# Altium PCB 定位系统.PcbDoc
Units mil, origin at the board's own origin, x right, y up, seen from the top; angles counter-clockwise.
Board outline 2449.82 x 1510.05 mil, 2 copper layers (Top Layer, Bottom Layer); 58 components, 79 nets, 259 pads, 94 vias.
Unrouted connection lines stored in the file: 1.
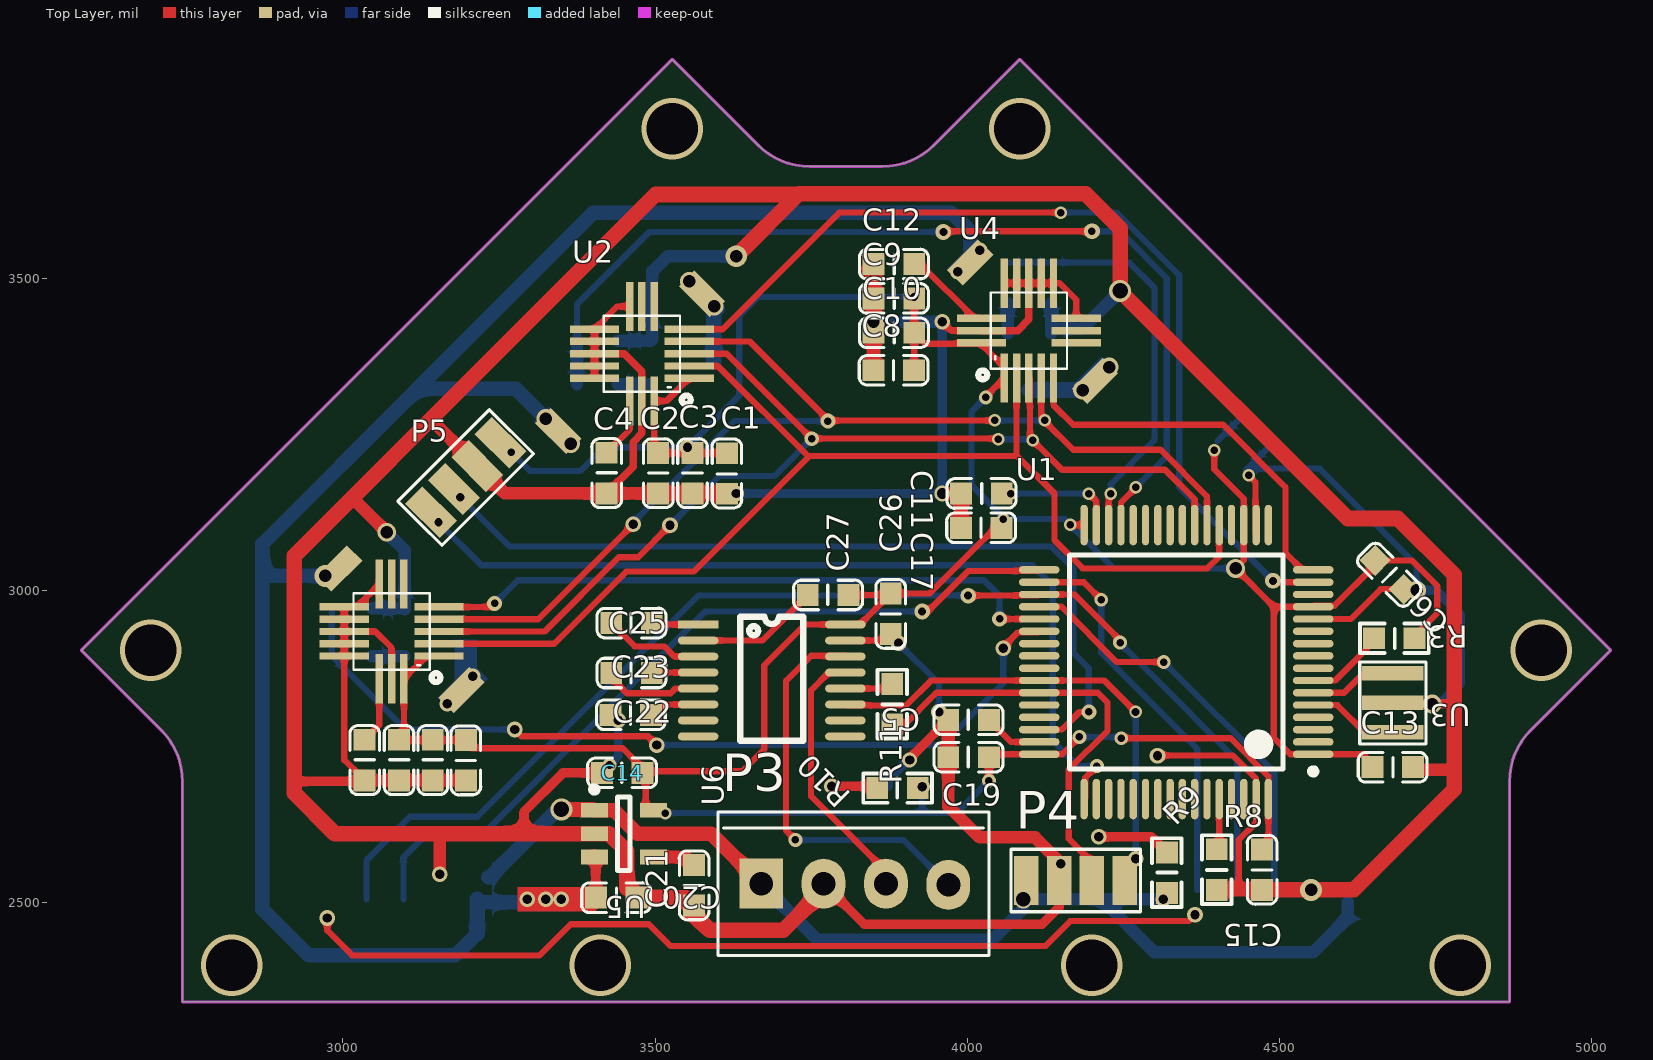
[diagram p0: Top Layer view]
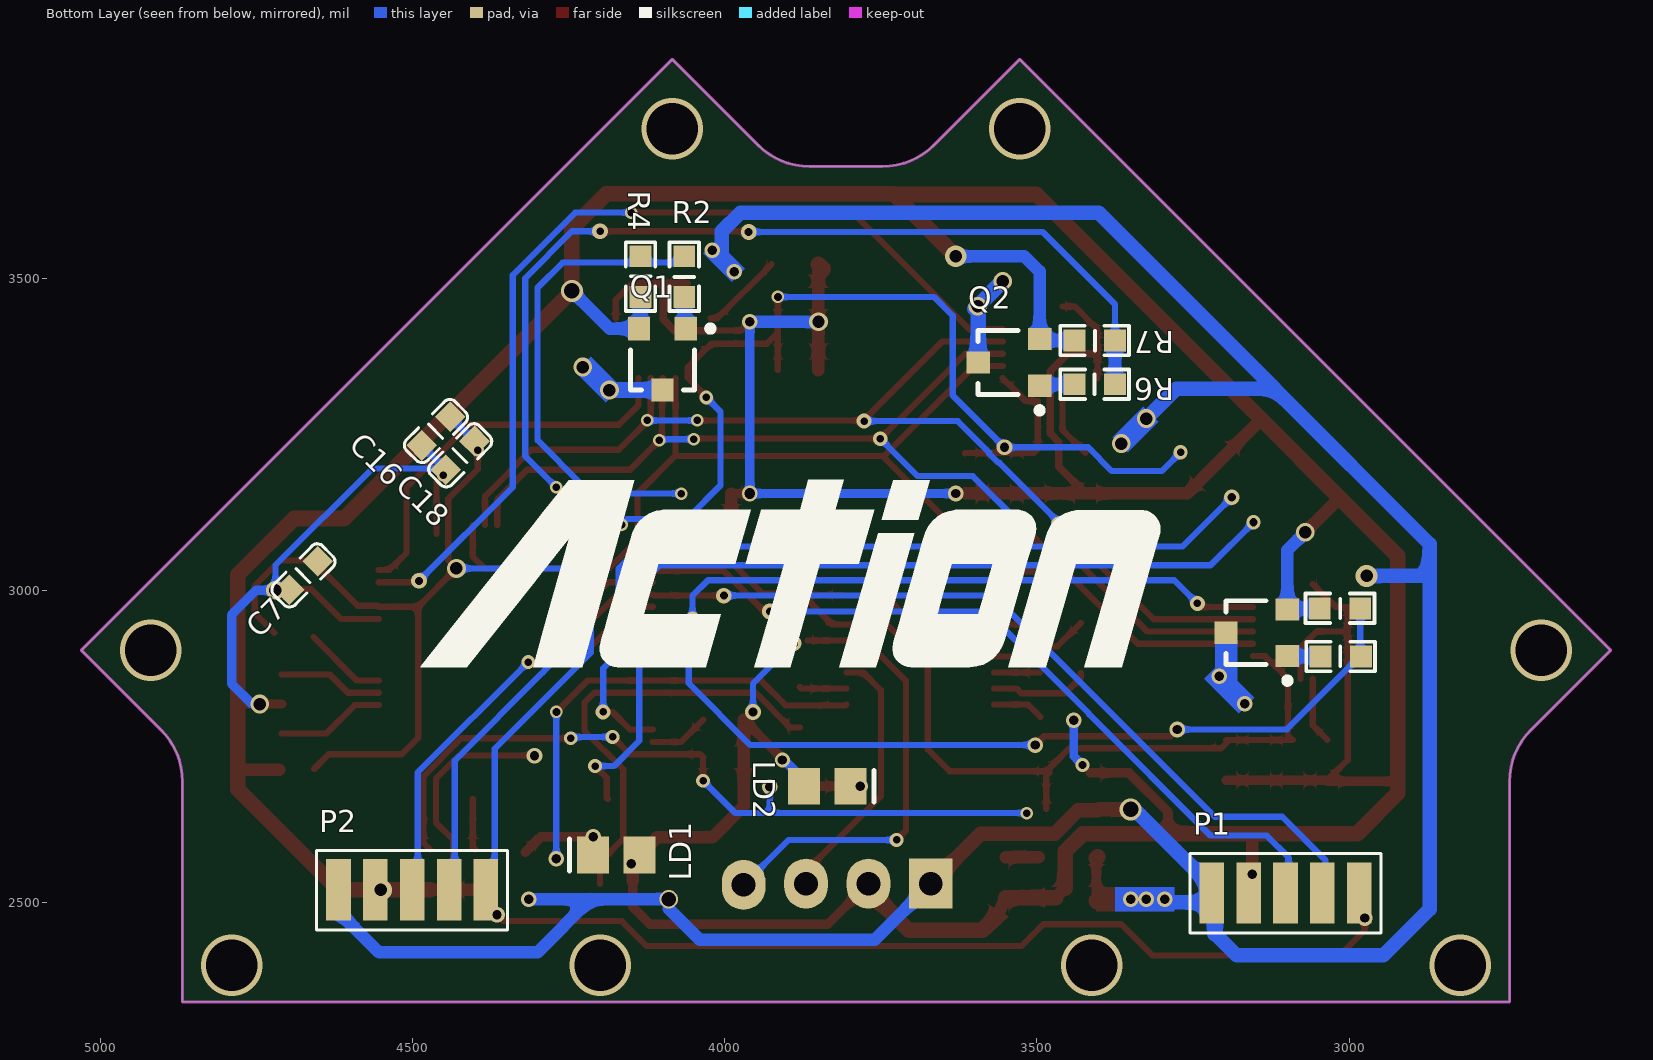
[diagram p1: Bottom Layer view, seen from below]
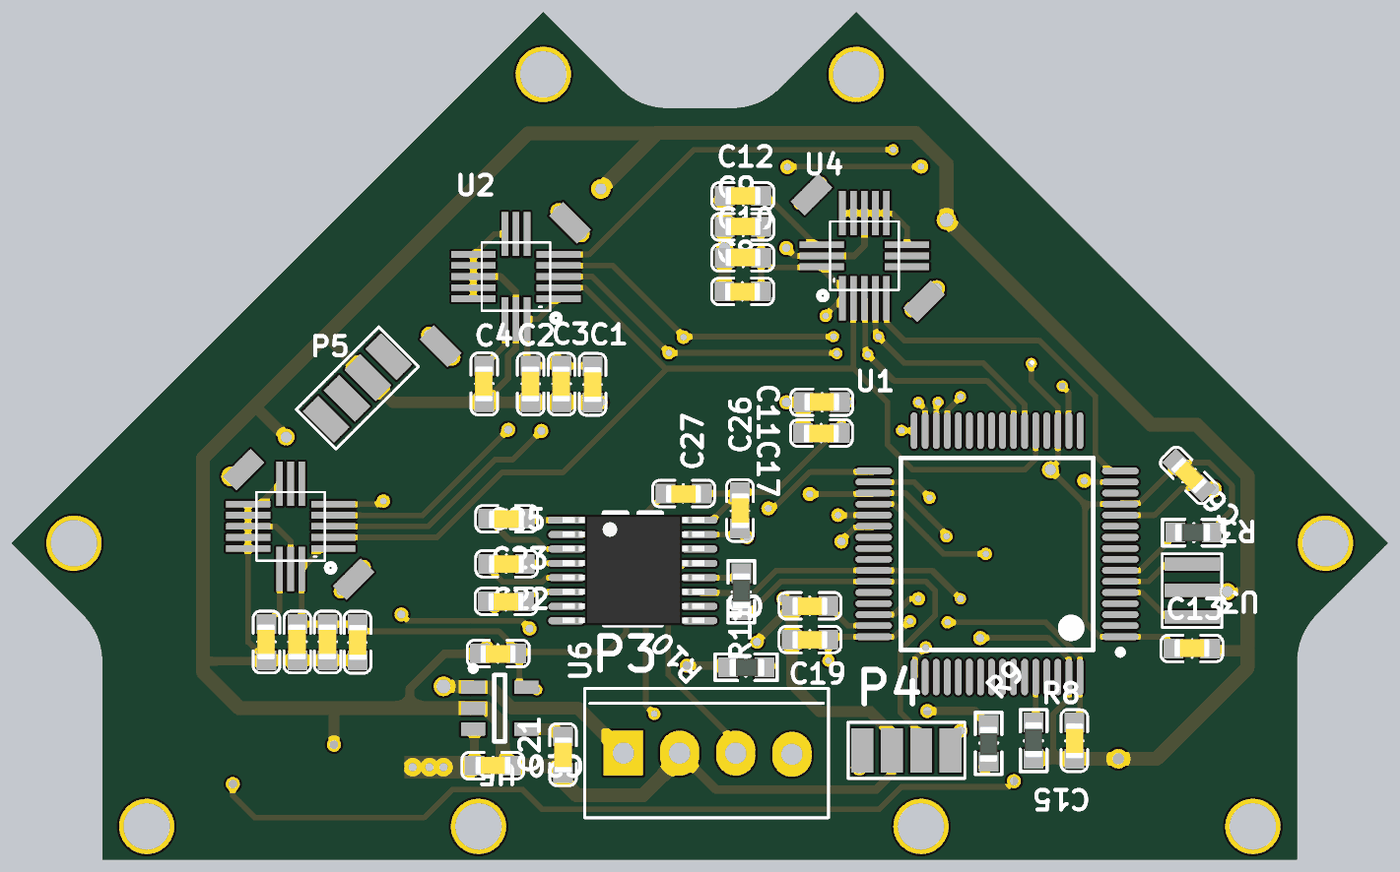
[diagram p2: 3D render of the assembled board from above, using the file's embedded part models]
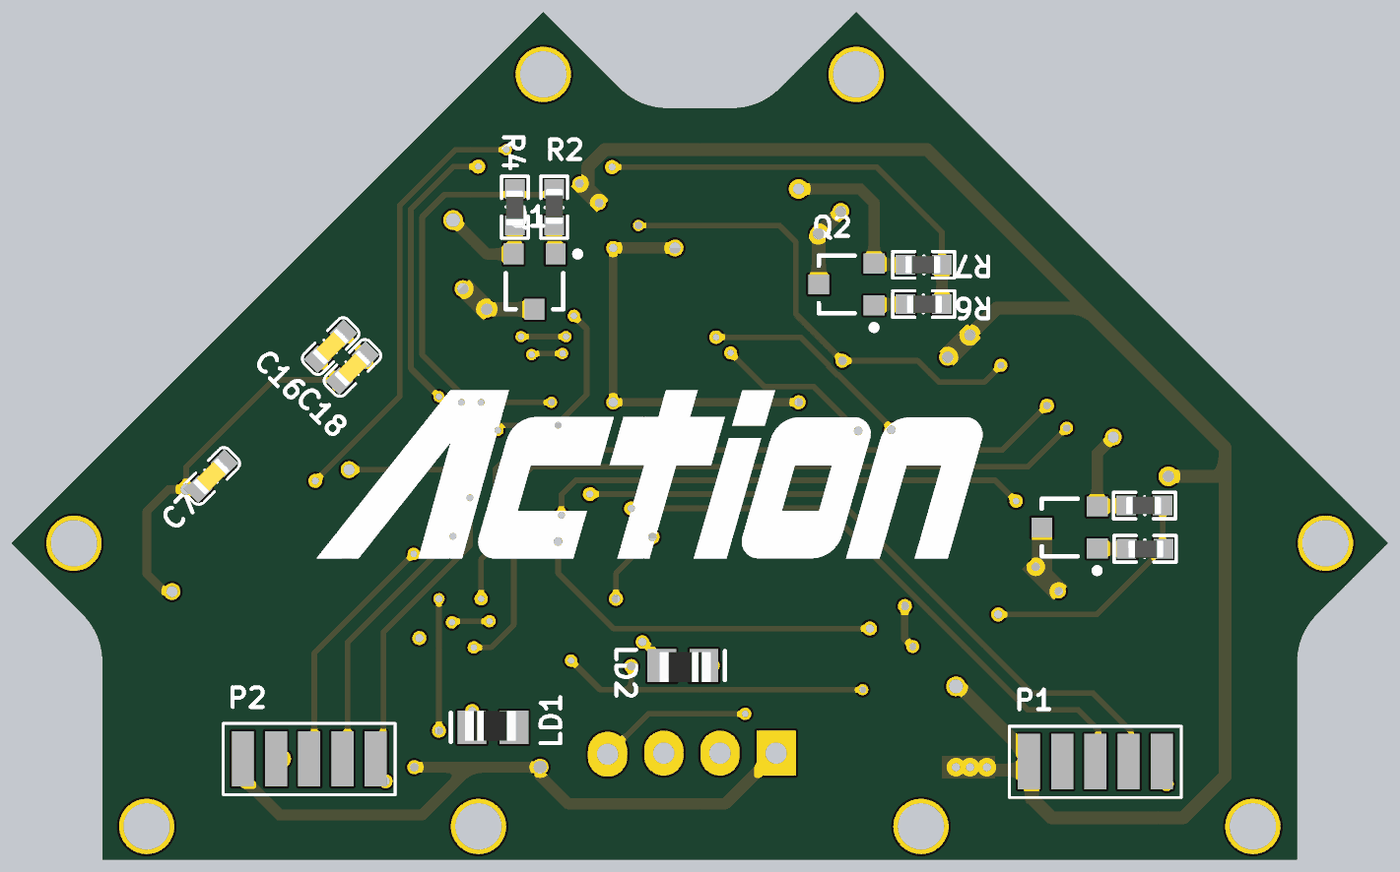
[diagram p3: 3D render of the assembled board from below, using the file's embedded part models]

## Layer stack, top to bottom
Top Solder: solder mask 0.4, Solder Resist, Dk 3.5
Top Layer: signal copper 1.4
Dielectric 1: dielectric 12.6, FR-4, Dk 4.8
Bottom Layer: signal copper 1.4
Bottom Solder: solder mask 0.4, Solder Resist, Dk 3.5

## Board outline
2742.96,2693.08 ccw(c2624.84,2693.08) 2708.36,2776.6 2581.04,2903.92 3527.56,3850.44 3664.44,3713.57 ccw(c3747.95,3797.08) 3747.95,3678.97 3863.94,3678.97 ccw(c3863.94,3797.08) 3947.46,3713.57 4084.34,3850.44 5030.86,2903.92 4903.53,2776.6 ccw(c4987.05,2693.08) 4868.94,2693.08 4868.94,2340.39 2742.96,2340.39

## Design rules (kind name [scope] priority, off if disabled: settings)
Clearance [All] p1: gap=7 ignorepadtopadclearanceinfootprint=FALSE
PolygonConnect [All] p1: connectstyle=Direct reliefconductorwidth=10 reliefentries=4 polygonreliefangle="90 Angle" airgapwidth=10
RoutingVias [All] p1: holewidth=28 width=50 viastyle="Through Hole" minholewidth=28 minwidth=50 maxholewidth=28 maxwidth=50
SolderMaskExpansion [All] p1: expansion=4
Width [All] p1: maxlimit=50 minlimit=10 preferedwidth=10
30 further rules are at their usual default settings.

## Classes and differential pairs
component class 定位系统: C1 C2 C3 C4 C5 C6 C7 C8 C9 C10 C11 C12 C13 C14 C15 C16 C17 C18 C19 C20 C21 C22 C23 C25 C26 C27 C? LD1 LD2 P1 P2 P3 P4 P5 Q1 Q2 R2 R3 R4 R6 R7 R8 R9 R10 R11 U1 U2 U3 U4 U5 U6 U? ""

## Components (designator, comment, footprint, x,y, rotation, side; value= is the part's Value field where it differs from the comment)
C1 "103" C-0603C 3642.6,3244.77 r270 top
C2 "104" C-0603C 3477.6,3129.77 r90 top
C3 "2.2uF" C-0603C 3532.6,3129.77 r90 top
C4 "0.1UF" C-0603C 3395,3130 r90 top value=0.47uF
C5 "2.2uF" C-0603C 4060,2765 r180 top
C6 "104" C-0603C 4655,3085 r315 top
C7 "105" C-0603C 4615,3045 r315 bottom
C8 "103" C-0603C 3940,3325 r180 top
C9 "104" C-0603C 3825,3495 r0 top
C10 "2.2uF" C-0603C 3825,3440 r0 top
C11 "2.2uf" C-0603C 3965.23,3182.6 r0 top
C12 "0.1UF" C-0603C 3825,3550 r0 top
C13 "104" C-0603C 4624,2744 r0 top
C14 "105" C-0603C 3505,2680 r180 top
C15 "104" C-0603C 4500,2610 r270 top
C16 "104" C-0603C 4402.68,3276.36 r315 bottom
C17 "104" C-0603C 4080.23,3072.6 r180 top
C18 "104" C-0603C 4363.79,3237.46 r315 bottom
C19 "106" C-0603C 4060,2705 r180 top
C20 "105" C-0603C 3380,2535 r0 top
C21 "105" C-0603C 3590,2585 r270 top
C22 "104" C-0603C 3519,2773 r180 top
C23 "104" C-0603C 3520,2840 r180 top
C24 "103" C-0603C 3224.4,2785.23 r270 top
C25 "104" C-0603C 3520,2920 r180 top
C26 "104" C-0603C 3905,3020 r270 top
C27 "104" C-0603C 3835,2965 r180 top
C28 "104" C-0603C 3062.4,2670.23 r90 top
C29 "2.2uF" C-0603C 3116.4,2670.23 r90 top
C30 "0.1UF" C-0603C 3007.4,2670.23 r90 top
LD1 "LED" D-0805D 4174,2576 r180 bottom
LD2 "LED" D-0805D 3836,2686 r0 bottom
P1 "Header 5" FPC5-1.0 3220,2515 r180 bottom
P2 "Header 5" FPC5-1.0 4619,2520 r180 bottom
P3 "4针排针" 4p-white 3670,2530 r0 top
P4 "4针排针" DOWMNPAD_S 4095,2535 r0 top
P5 "下载口" DOWMNPAD_S 3141,3125 r45 top
Q1 "NPN" sot-23 4100,3370 r0 bottom
Q2 "NPN" sot-23 3545,3365 r90 bottom
Q3 "NPN" sot-23 3148,2932 r90 bottom
R2 "331" R-0603R 4040,3560 r270 bottom
R3 "102" R-0603R 4627,2948 r0 top
R4 "103" R-0603R 4160,3445 r90 bottom
R6 "331" R-0603R 3350,3305 r0 bottom
R7 "103" R-0603R 3465,3425 r180 bottom
R8 "102" R-0603R 4425,2610 r270 top
R9 "102" R-0603R 4295,2490 r90 top
R10 "471" R-0603R 3946,2658 r180 top
R11 "0R" R-0603R 3905,2875 r270 top
R13 "331" R-0603R 2956,2869 r0 bottom
R14 "103" R-0603R 3072,2996 r180 bottom
U1 "MCU" LQFP64-STM32F405RG 4335,2885 r180 top
U2 "ICM-20608-G" ICM-20608-G 3540,3440 r180 top
U3 "TXAL-3" 8M贴片晶振 4682,2867 r270 top
U4 "ICM-20608-G" ICM-20608-G 4160,3355 r90 top
U5 "LDO-3.0V" SOT95P280X145-5N 3450,2610 r0 top
U6 "SP3232" TSSOP-16 3685,2955 r0 top
U7 "ICM-20608-G" ICM-20608-G 3139,2995 r180 top

## Footprints (in the part's own frame and the unit in brackets; to place one, negate y for a bottom-side part, rotate by r counter-clockwise, add the part's x,y. Pads: shape width x height; smd on the part's side, far side on the other; paste and mask are expansions set on the pad)
4p-white [mil]
  rect 70x80 hole 38: 1(0,0)
  oval 70x80 hole 38: 2(100,0) 3(200,0) 4(300,-2)
  silkscreen extent -69,-115 365,115
8M贴片晶振 [mm] "8M贴片晶振"
  rect 0.6x2.5 smd: 1(0,0) 2(1.2,0) 3(2.4,0)
  silkscreen extent -0.46,-1.35 2.87,1.35
C-0603C [mil]
  rect 35x35 smd: 1(25.23,-27.4) 2(90.23,-27.4)
  silkscreen extent 3,-51 113,-4, body extent 3,-51 113,-4, height 10
D-0805D [mm]
  rect 1.3x1.5 smd: 1(-0.95,0) 2(0.95,0)
  silkscreen extent -1.9,-0.65 -1.9,0.65, body extent -1.26,-0.61 1.04,0.74, height 0.76
DOWMNPAD_S [mm]
  rect 1x2 smd: 1(0,0) 2(1.333,0) 3(2.667,0) 4(4,0)
  silkscreen extent -0.64,-1.27 4.63,1.27
FPC5-1.0 [mm]
  rect 1x2.5 smd: 1(0,0) 2(1.5,0) 3(3,0) 4(4.5,0) 5(6,0)
  silkscreen extent -0.89,-1.63 6.88,1.6
ICM-20608-G [mm] "ICM-20608-G"
  rect 2x0.3 smd: 1(-0.375,2.55) 2(-0.375,2.05) 3(-0.375,1.55) 4(-0.375,1.05) 5(-0.375,0.55) 9(3.475,0.55) 10(3.475,1.05) 11(3.475,1.55) 12(3.475,2.05) 13(3.475,2.55)
  rect 0.3x2 smd: 6(1.05,-0.375) 7(1.55,-0.375) 8(2.05,-0.375) 14(2.05,3.475) 15(1.55,3.475) 16(1.05,3.475)
  silkscreen extent -0.43,0 3.1,3.61
LQFP64-STM32F405RG [mm] "TSQFP, 64-Leads, Body 12.0x12.0mm (max), Pitch 0.50mm, IPC Medium Density"
  oval 1.65x0.3 smd: 1(-5.575,3.75) 2(-5.575,3.25) 3(-5.575,2.75) 4(-5.575,2.25) 5(-5.575,1.75) 6(-5.575,1.25) 7(-5.575,0.75) 8(-5.575,0.25) 9(-5.575,-0.25) 10(-5.575,-0.75) 11(-5.575,-1.25) 12(-5.575,-1.75) 13(-5.575,-2.25) 14(-5.575,-2.75) 15(-5.575,-3.25) 16(-5.575,-3.75) 33(5.575,-3.75) 34(5.575,-3.25) 35(5.575,-2.75) 36(5.575,-2.25) 37(5.575,-1.75) 38(5.575,-1.25) 39(5.575,-0.75) 40(5.575,-0.25) 41(5.575,0.25) 42(5.575,0.75) 43(5.575,1.25) 44(5.575,1.75) 45(5.575,2.25) 46(5.575,2.75) 47(5.575,3.25) 48(5.575,3.75)
  oval 0.3x1.65 smd: 17(-3.75,-5.575) 18(-3.25,-5.575) 19(-2.75,-5.575) 20(-2.25,-5.575) 21(-1.75,-5.575) 22(-1.25,-5.575) 23(-0.75,-5.575) 24(-0.25,-5.575) 25(0.25,-5.575) 26(0.75,-5.575) 27(1.25,-5.575) 28(1.75,-5.575) 29(2.25,-5.575) 30(2.75,-5.575) 31(3.25,-5.575) 32(3.75,-5.575) 49(3.75,5.575) 50(3.25,5.575) 51(2.75,5.575) 52(2.25,5.575) 53(1.75,5.575) 54(1.25,5.575) 55(0.75,5.575) 56(0.25,5.575) 57(-0.25,5.575) 58(-0.75,5.575) 59(-1.25,5.575) 60(-1.75,5.575) 61(-2.25,5.575) 62(-2.75,5.575) 63(-3.25,5.575) 64(-3.75,5.575)
  silkscreen extent -5.7,-4.35 4.35,4.57, body extent -5,-5 5,5, height 1.6
R-0603R [mil]
  rect 35x35 smd: 1(25,-25) 2(90,-25)
  silkscreen extent 2,-49 113,-1, body extent 24,-40 87,-9, height 15
SOT95P280X145-5N [mm] "SOT23, 5-Leads, Body 3.0x3.0mm (max), Pitch 0.95mm, IPC Medium Density"
  rect 1.1x0.6 smd: 1(-1.2,0.95) 2(-1.2,0) 3(-1.2,-0.95) 4(1.2,-0.95) 5(1.2,0.95)
  silkscreen extent -1.32,-1.5 0.25,1.92, body extent -0.87,-1.52 0.87,1.53, height 1.45
sot-23 [mm]
  rect 0.9x0.95 smd: 1(-0.95,-1.25) 2(0.95,-1.25) 3(0,1.25)
  silkscreen extent -2.07,-1.37 1.3,1.25
TSSOP-16 [mil]
  rect 65x12.5 smd: 1(-116,-10)
  oval 65x12.5 smd: 2(-116,-35.59) 3(-116,-61.18) 4(-116,-86.77) 5(-116,-112.36) 6(-116,-137.95) 7(-116,-163.54) 8(-116,-189.13) 9(120,-189.13) 10(120,-163.54) 11(120,-137.95) 12(120,-112.36) 13(120,-86.77) 14(120,-61.18) 15(120,-35.59) 16(120,-10)
  silkscreen extent -48,-196 52,3, body extent -123,-197 129,-1, height 47

## Part data
C1 C2 C3 C4 C5 C6 C7 C8 C9 C10 C11 C12 C13 C15 C16 C17 C18 C19 C24 C28 C29 C30: library part Cap, "Capacitor", LatestRevisionDate=17-Jul-2002, LatestRevisionNote="Re-released for DXP Platform.", PackageReference=RAD-0.3, Published=8-Jun-2000, Publisher="Altium Limited"
C14 C20 C21 C22 C23 C25 C26 C27: library part CAP, "Capacitor"
P1 P2: "Header, 5-Pin", LatestRevisionDate=17-Jul-2002, LatestRevisionNote="Re-released for DXP Platform.", Publisher="Altium Limited"
P3 P4 P5: library part "Header 4", "Header, 4-Pin", LatestRevisionDate=17-Jul-2002, LatestRevisionNote="Re-released for DXP Platform.", Publisher="Altium Limited"
Q1 Q2 Q3: "NPN Bipolar Transistor", Code_JEDEC=TO-226-AA, LatestRevisionDate=17-Jul-2002, LatestRevisionNote="Re-released for DXP Platform.", PackageReference=TO-226, Published=8-Jun-2000, Publisher="Altium Limited"
R2 R3 R4 R6 R7 R9 R10 R13 R14: library part "Res Semi", "Semiconductor Resistor", LatestRevisionDate=17-Jul-2002, LatestRevisionNote="Re-released for DXP Platform.", PackageDescription="Axial Device, Thru-Hole; 2 Leads; 0.5 in Pin Spacing", PackageReference=AXIAL-0.5, Published=8-Jun-2000, Publisher="Altium Limited"
R8: library part Res2, "Resistor", LatestRevisionDate=17-Jul-2002, LatestRevisionNote="Re-released for DXP Platform.", PackageReference=AXIAL-0.4, Published=8-Jun-2000, Publisher="Altium Limited"
R11: library part RES2
U1: library part STM32F405RGT7
U5: library part TPS73230MDBVREP, "TPS73230MDBVREP"
U6: library part Component_1

## Free pads (board coordinates)
  rect 70x35 smd rot 135: 10(3575,3475) 11(3345,3255)
  rect 70x35 smd rot 45: 10(4005,3525) 11(2994,3035) 11(3190,2840) 11(4205,3335)

## Via types
v1: diameter 25, hole 15, Top Layer to Bottom Layer, 28 vias
v2: diameter 20, hole 12, Top Layer to Bottom Layer, 14 vias
v3: diameter 30, hole 20, Top Layer to Bottom Layer, 11 vias
v4: diameter 22, hole 12, Top Layer to Bottom Layer, 9 vias
v5: diameter 98.43, hole 82.68, Top Layer to Bottom Layer, 8 vias
v6: diameter 25, hole 13, Top Layer to Bottom Layer, 5 vias
v7: diameter 24, hole 12, Top Layer to Bottom Layer, 4 vias
v8: diameter 35, hole 20, Top Layer to Bottom Layer, 3 vias
v9: diameter 23, hole 13, Top Layer to Bottom Layer, 2 vias
v10: diameter 23, hole 12, Top Layer to Bottom Layer, 2 vias
v11: diameter 35, hole 25, Top Layer to Bottom Layer, 2 vias
v12: diameter 20, hole 13, Top Layer to Bottom Layer, 2 vias
v13: diameter 24, hole 15, Top Layer to Bottom Layer, 1 vias
v14: diameter 30, hole 23, Top Layer to Bottom Layer, 1 vias
v15: diameter 25, hole 12, Top Layer to Bottom Layer, 1 vias
v16: diameter 25, hole 17, Top Layer to Bottom Layer, 1 vias

## Nets (pads, with @x,y where several pads share a name; then routed paths per layer and width w, separated by ;. In a path a pad name is that pad's centre, name@x,y a point inside that pad or via, vN(x,y) a via of type N, cw(c..) or ccw(c..) an arc to the next point about the centre after c; other vN are vias at no path point)
3V: C1.1 C2.2 C3.2 C6.1 C7.1 C8.1 C9.2 C10.2 C13.1 C14.1 C15.1 C16.1 C17.1 C18.1 C19.1 C24.1 C26.1 C27.1 C28.2 C29.2 P5.4 R3.2 R10.1 U1.1 U1.13 U1.19 U1.32 U1.48 U1.64 U2.1 U2.16 U4.1 U4.16 U5.5 U6.16 U7.1 U7.16 | length 6014.8
  Top Layer w10: C28.2@3097.66,2773.59 U7.16 3134.08,2894.61 U7.1 ; C28.2@3098.06,2767.81 3090.25,2760 C24.1 ; C24.1@3193,2759 3205,2747 3448,2747 3479.77,2715.23 C14.1 ; U5.5@3485,2650 C14.1@3485,2707.4 ; C14.1@3485,2712.62 3482.38,2710 3640,2710 3675,2745 3675,2880 3740,2945 U6.16 3827.83,2945 3875.23,2992.4 C27.1 ; U2.1 3518.35,3303.19 U2.16 3498.66,3226.34 C2.2 C3.2 3614.75,3220 C1.1 ; C26.1@3890,2995 3940,2995 4045,3100 C17.1 ; C8.1@3915.23,3352.85 C10.2 ; C9.2 C10.2 ; v4(4030,3309) 4030,3310.63 U4.1 4059.61,3357.24 4021.85,3395 3932.83,3395 C10.2 ; v4(4035,2695) 4035,2732.17 C19.1 4039.74,2737.36 U1.48 4152.36,2737.36 v4(4180,2765) ; v2(4165,3105) 4165.51,3104.49 U1.32 ; v4(4247,2763) 4422,2763 4482.64,2702.36 U1.64 4482.64,2594.81 C15.1 ; v2(4396,3224) 4396,3194 4443.27,3146.73 U1.19 4443.27,3048.27 v3(4430,3035) 4491.42,2973.58 ; C13.1@4658.23,2713.6 4634.47,2737.36 U1.1 4517.64,2737.36 4491.42,2763.58 4491.42,2973.58 ; R3.2@4722,2932 4753,2963 4753,3007 4712.21,3047.79 C6.1 4653.46,3040.35 4588.48,2975.36 4556.27,2975.36 U1.13 4491.42,2973.58
  Bottom Layer w10: v10(3270,3221) 3300,3191 3380,3191 3418,3229 v1(3552,3229) 3635,3312 3635,3440 3665,3470 v12(3915,3470) ; v2(3516,2643) 3928,2643 ; v1(3928,2685) 3928,2643 ; v4(4030,3309) 4007,3286 4007,3168 4058,3117 v2(4058,3114) 4157,3114 4156.5,3113.5 v2(4165,3105) 4235,3035 v3(4430,3035) ; v4(4035,2695) 3983,2643 3928,2643 ; v4(4180,2765) 4245,2765 v4(4247,2763) ; C18.1 C16.1 C16.1@4446,3284
+5V: C20.1 P1.1 P2.1 P3.1 P4.1 pad.10@4005,3525 pad.11@2994,3035 pad.11@3345,3255 R9.1 U5.1 U5.3 | length 4724
  Top Layer w15: C20.1@3405,2512.32 U5.3@3405,2570.35
  Top Layer w23: v11(3350,2649) U5.1@3400.16,2649 ; U5.1 3434.25,2647.4 3471.65,2610 3590,2610 P3.1
  Top Layer w25: C20.1@3402.76,2500.07 C20.1@3405,2502.32 ; U5.3 U5.3@3405,2570.35
  Bottom Layer w20: P3.1 3760,2440 4040,2440 4090,2490 v14(4090,2505) 4215,2505 ; v1@4316,2503 v1(4314,2505) 4215,2505 ; P2.1@4610,2500 4610,2476 4554,2420 4300,2420 4215,2505
  Bottom Layer w23: v8(2972,3023) 2885,3023 2871,3037 ; 3120,3323 2871,3074 2871,3037 ; 3215,2450 3180,2415 2945,2415 2871,2489 2871,3037 ; P1.1@3220,2500 v1@3295,2500 ; P1.1@3233,2540 3235,2540 v11@3345,2650 ; v3(3365,3235) 3277,3323 3119,3323 3401,3605 3975,3605 4005,3575 4005,3534
  Bottom Layer w25: 3215,2450 3215,2505 P1.1@3220,2500 ; v1(3295,2505) v1(3325,2505)
  other v1: 3350,2505 3985,3510 4020,3545
  other v3: 3325,3275
GND: C1.2 C2.1 C3.1 C4.1 C5.2 C6.2 C7.2 C8.2 C9.1 C10.1 C11.1 C12.1 C13.2 C14.2 C15.2 C16.2 C17.2 C18.2 C19.2 C20.2 C21.2 C22.2 C24.2 C26.2 C28.1 C29.1 C30.1 LD1.2 LD2.2 P1.2 P2.2 P3.2 P4.2 P5.3 Q1.2 Q2.2 Q3.2 R4.1 R7.1 R8.2 R14.1 U1.12 U1.18 U1.63 U2.8 U2.9 U2.10 U2.11 U2.12 U2.13 U2.15 U3.2 U4.8 U4.9 U4.10 U4.11 U4.12 U4.13 U4.15 U5.2 U6.15 U7.8 U7.9 U7.10 U7.11 U7.12 U7.13 U7.15 | length 11557
  Top Layer w10: 3002.19,2727.66 U7.13 U7.12 U7.11 ; 3002.59,2727.66 C30.1 ; U7.8 3021.87,2973.35 U7.9 U7.10 U7.11 ; U7.15 3077.98,2908.02 3052.02,2933.98 U7.11 ; U2.13 U2.12 U2.11 U2.10 U2.9 3439.61,3454.76 U2.8 ; C1.2@3614.53,3155.23 C1.2 ; U6.15 C26.2@3867.24,2919.41 ; v1(3960,3430) 3973.98,3416.02 U4.15 ; C11.1@3990,3154.75 C11.1 ; U4.13 U4.12 U4.11 U4.9 4148.19,3491.81 4174.76,3465.24 U4.8 ; v1(4305,2735) 4305.48,2735.48 4425.48,2735.48 4462.95,2698.01 U1.63 4462.95,2627.95 4435,2600 4435,2520 ; v2(4451,3184) 4458.95,3176.05 ; U1.18@4461.95,3090.49 4461.95,3173.05 ; U1.12 4614.9,2953.9 4662.83,3001.83 C6.2
  Top Layer w12: U2.11 3451.02,3378.98 3478.98,3351.02 U2.15 3478.98,3251.35 3465,3237.37 3465,3197.83 C4.1 ; U4.15 4081.02,3416.02 4098.98,3433.98 U4.11
  Top Layer w15: 2920,2694 C30.1@3034.79,2694 ; C30.1 C28.1 C29.1 C24.2@3196.55,2695.45 ; 3290,2610 3290,2645 3352.4,2707.4 C14.2 ; P3.2 3835,2465 4120,2465 4147.49,2492.49 P4.2 ; v13(3908,2728) 3908,2730.62 C5.2 ; v16(3960,3155) C11.1@3989.75,3155 ; U3.2@4710,2817.76 4762.24,2817.76 4762,2818 4782,2818
  Top Layer w20: 3015,3148 v3(3070,3093) ; 3140.5,3273.5 3140.97,3273.5 P5.3 3259.25,3155.23 C4.1 C1.2@3614.53,3155.23 ; v1(3155,2545) 3155,2610 ; C20.2@3455,2522.83 C20.2 ; C21.2@3549.77,2507.6 C21.2@3562.6,2479.77 ; C8.2@3850.23,3352.85 C9.1 C12.1 ; C5.2 C19.2 3969.77,2654.23 4020,2604 4109.1,2604 4147.49,2565.6 P4.2 ; C17.2 C11.1@3990,3154.75 ; R8.2 4435,2520 C15.2@4472.38,2520 ; C13.2@4714.23,2712.6 4780.6,2712.6
  Top Layer w25: C20.2@3455,2522.83 3455,2581.4 3426.4,2610 U5.2 3290,2610 2987,2610 2922,2675 2922,3055 3015,3148 3140.5,3273.5 3501,3634 3729,3634 v8(3630,3535) ; C20.2 C21.2@3549.77,2507.6 ; C21.2@3562.6,2479.77 3587.38,2455 3705,2455 3770,2520 P3.2 ; 3730,3635 4190,3635 4245,3580 v11(4245,3479.65) 4609.65,3115 4690,3115 4780.6,3024.4 4780.6,2712.6 4780.6,2681.6 4619,2520 C15.2@4472.38,2520 ; C12.1@3842.62,3515 C12.1
  Bottom Layer w10: v1(3890,2915) 3955,2850 v1(3955,2805) ; v16(3960,3155) v16@3965,3155 ; Q1.2@4135,3411.61 Q1.2@4137.4,3409.21 ; C18.2 C16.2 ; C18.2@4455,3195 4565,3195 4720,3040 v3(4720,3000)
  Bottom Layer w13: v9(3427,2720) 3441,2734 v1(3441,2792)
  Bottom Layer w15: v1(3630,3155) v16(3960,3155) v1(3960,3430) ; LD2.2 3873.4,2696.03 3905.38,2728 v13(3908,2728) ; v3(4720,3000) 4751,3000 4790,2961 4790,2850 4757.76,2817.76 v3(4745,2817.76)
  Bottom Layer w20: R14.1 3097.19,2971 Q3.2 3098.79,3064.21 v3(3070,3093) ; R7.1 Q2.2@3493.39,3400 ; Q2.2 3495.79,3510.79 3520,3535 v8(3630,3535) ; v3(3850,3430) v1(3960,3430) ; Q1.2@4135,3411.61 R4.1@4135,3460 ; Q1.2 4184.56,3419.21 v11(4245,3479.65)
  other v1: 4150,2562
  other v8: 4550.94,2520
Net_1: pad.11@3190,2840 Q3.3
  other v1: 3167,2818 3208,2862
Net_2: Q3.1 R13.2 | length 52.2
  Bottom Layer w20: R13.2 Q3.1@3098.19,2894
Net_2: C30.2 U7.14 | length 107.5
  Top Layer w10: C30.2 3058.29,2783.95 U7.14
NetC4_2: C4.2 U2.14 | length 98.2
  Top Layer w10: C4.2 3459.29,3257.12 U2.14
NetC5_1: C5.1 U1.47 | length 95.4
  Top Layer w10: C5.1 4070.12,2757.05 U1.47
NetC11_2: C11.2 U1.31 | length 180.5
  Top Layer w10: v2(4195,3155) 4207.05,3142.95 U1.31
  Bottom Layer w10: v2(4070,3155) v2(4195,3155)
NetC12_2: C12.2 U4.14 | length 134
  Top Layer w10: C12.2@3925.23,3522.6 4012.12,3435.71 U4.14
NetC21_1: C21.1 U5.4 | length 52.5
  Top Layer w20: U5.4 C21.1@3549.78,2572.6
NetC22_1: C22.1 U6.6 | length 82.4
  Top Layer w10: C22.1@3494.77,2797.4 3514.42,2817.05 U6.6
NetC23_1: C23.1 U6.4 | length 73.4
  Top Layer w10: C23.1@3495.6,2868.23 U6.4
NetC23_2: C23.2 U6.5 | length 160
  Top Layer w10: C23.2 3429.77,2860.23 3455,2835 3525,2835 3532.64,2842.64 U6.5
NetC25_1: C25.1 U6.1 | length 75.2
  Top Layer w10: C25.1 3497.17,2945 U6.1
NetC25_2: C25.2 U6.3 | length 161.4
  Top Layer w10: C25.2 3467.17,2910 3515,2910 3531.18,2893.82 U6.3
NetC27_2: C27.2 U6.2 | length 206
  Top Layer w10: U6.2 3671.79,2919.41 C27.2
NetLD1_A: LD1.1 R9.2 | length 119.4
  Top Layer w15: v1(4211,2605) 4295,2605 R9.2
NetLD2_A: LD2.1 R10.2 | length 69
  Top Layer w15: v1(3783,2686) R10.2@3852,2686
NetQ1_1: pad.11@4205,3335 Q1.3 | length 142.7
  Bottom Layer w25: Q1.3 4190.79,3320.79 v3(4227.5,3357.5)
  other v3: 4185,3320.79
NetQ1_2: Q1.1 R2.2 | length 51.8
  Bottom Layer w10: Q1.1@4062.6,3409.21 Q1.1@4065,3411.61
  Bottom Layer w20: Q1.1@4065,3411.61 R2.2@4065,3460
NetQ2_1: pad.10@3575,3475 Q2.3 | length 153.3
  Bottom Layer w25: v3(3555,3495) v3@3599.21,3450.79 ; Q2.3 v3@3594.21,3455.79
  other v3: 3595,3455
NetQ2_2: Q2.1 R6.2 | length 53.4
  Bottom Layer w20: R6.2 Q2.1@3493.39,3330
NetR3_1: R3.1 U1.7 | length 133.3
  Top Layer w10: U1.7 4589.47,2855.47 R3.1@4659,2925
NetR8_1: R8.1 U1.60 | length 82.1
  Top Layer w10: R8.1 4403.9,2588.9 U1.60
NetR11_1: R11.1 U6.12 | length 76
  Top Layer w10: U6.12 3877.64,2842.64 R11.1@3880,2845
OSC_IN: U1.5 U3.3 | length 174.4
  Top Layer w10: U1.5 4592.9,2816.1 4638.49,2770.51 U3.3@4710,2770.51
OSC_OUT: U1.6 U3.1 | length 167.6
  Top Layer w10: U1.6 4603.79,2835.79 4633,2865 U3.1@4710,2865
PA0: U1.14
PA1: U1.15 U2.5 | length 1521.4
  Top Layer w10: U2.5 3608.35,3418.35 3795,3605 v2(4150,3605) ; v6(4490,3015) 4492.05,3012.95 U1.15
  Bottom Layer w10: v2(4150,3605) 4240,3605 4340,3505 4340,3165 v6(4490,3015)
PA2: U1.16 U4.5 | length 630.6
  Top Layer w10: U4.5 4138.35,3296.65 4170,3265 4375,3265 4410,3265 4510,3165 4510,3060 4537.36,3032.64 U1.16
PA3: U1.17
PA4: U1.20
PA5: U1.21 U2.2 U4.2 U7.2 | length 1928.1
  Top Layer w10: U7.2 3338.29,2914.29 3454,3030 3562,3030 3746,3214 3600.71,3359.29 U2.2 ; 3745,3215 4079.29,3215 U4.2 ; 4080,3215 4140,3155 4140,3080 4185,3035 4385,3035 4403.9,3053.9 U1.21
PA6: U1.22 U2.4 U4.4 U7.4 | length 1810.8
  Top Layer w10: U7.4 3312.66,2953.66 v1(3465,3106) ; U2.4 3651.34,3398.66 3778,3272 v2(4044,3272) ; U4.4 4118.66,3276.34 4123,3272 v2(4124,3272) 4124,3271 4170,3225 4310,3225 4384.21,3150.79 U1.22
  Bottom Layer w10: v1(3465,3106) 3465,3109 3560.5,3204.5 3562.15,3204.5 3576.5,3218.85 3576.5,3220.5 3627,3271 v7(3777,3271) ; v2@4040.66,3272 v2(4044,3272) v2(4124,3272)
PA7: U1.23 U2.3 U4.3 U7.3 | length 1775.4
  Top Layer w10: U7.3 3322.98,2933.98 3442,3053 3473,3053 v1(3524,3104) ; U2.3 3615.02,3378.98 v10(3751,3243) 4049,3243 v2(4050,3242) ; U4.3 4100.76,3338.46 4100.76,3244.24 v2(4105,3240) 4152,3193 4317,3193 4364.53,3145.47 U1.23
  Bottom Layer w10: v1(3524,3104) 3603,3183 3691,3183 v10(3751,3243) ; v2(4050,3242) 4103,3242 v2(4105,3240)
PA8: U1.41
PA9: P4.4 U1.42 U6.11 | length 738.1
  Top Layer w10: U6.11 3806.55,2815.5 3902.47,2815.5 3942.44,2855.47 U1.42 4219.53,2855.47 v12(4270,2805)
  Bottom Layer w10: v1(4270,2570) v12(4270,2805)
PA10: P4.3 R11.2 U1.43 | length 705.6
  Top Layer w10: R11.2@3880,2780 3895,2780 3950.79,2835.79 U1.43 4209.21,2835.79 4225,2820 4225,2775 4163,2713 4163,2602 4199.99,2565.01 P4.3@4199.99,2530
PA11: U1.44
PA12: U1.45
PA15: U1.50
PB0: U1.26
PB1: U1.27
PB2: U1.28
PB3: U1.55
PB4: U1.56
PB5: U1.57
"PB6 TX": U1.58
"PB7 RX": U1.59
PB8: U1.61
PB9: U1.62
PB10: R6.1 R7.2 U1.29 | length 1583.5
  Top Layer w10: v6(3962,3574) 3963,3575 v15(4200,3575) v15@4200,3580 ; U1.29 4246.42,3140.3 4270,3163.89 v2(4270,3165)
  Bottom Layer w10: R7.2 3375,3458 3491,3574 v6(3962,3574) ; v15(4200,3575) 4245,3575 4320,3500 4320,3215 v2(4270,3165)
  Bottom Layer w20: R6.1 R7.2
PB11: R2.1 R4.2 U1.30 | length 662.4
  Top Layer w10: U1.30 4226.73,3151.73 v2(4230,3155)
  Bottom Layer w10: R2.1@4065,3525 4260,3525 4300,3485 4300,3240 4230,3170 v2(4230,3155)
PB12: P1.3 U1.33 | length 1276.7
  Top Layer w10: v6(3928,2966) 3937,2966 4001.86,3030.86 4113.73,3030.86 U1.33
  Bottom Layer w10: P1.3@3096.89,2505 3096.89,2571.89 3132,2607 3222,2607 3416.5,2801.5 3416.5,2802.15 3580.35,2966 v6(3928,2966)
PB13: P1.5 P2.5 U1.34 | length 2123.3
  Top Layer w10: v1(2975,2475) 2975,2455 3015,2415 3315,2415 3365,2465 3490,2465 3525,2430 4125,2430 4165,2470 4355,2470 v1(4365,2480) ; U1.34 4187.05,3012.95 v4(4215,2985)
  Bottom Layer w10: v4@4215,2986 v4(4215,2985) 4215,2900 4368.78,2746.22 P2.5@4368.78,2520
PB14: P1.4 P2.4 U1.35 | length 1950.8
  Top Layer w10: v6(4001.51,2991.49) 4113.73,2991.49 U1.35 4171.73,2993.27 4245,2920 v4(4245,2916.25)
  Bottom Layer w10: P1.4@3037.83,2505 3037.83,2567.83 3107,2637 3215,2637 3569.49,2991.49 v6(4001.51,2991.49) ; v4(4245,2916.25) 4245,2915 4290,2870 ; 4292.5,2867.5 4432.83,2727.17 P2.4@4432.83,2520
PB15: P2.3 U1.36 | length 674.5
  Top Layer w10: U1.36 4151.42,2973.58 4240,2885 v4(4315,2885)
  Bottom Layer w10: v4(4315,2885) 4491.89,2708.11 P2.3@4491.89,2520
PC0: U1.8
PC1: U1.9
PC2: U1.10
PC3: U1.11
PC4: U1.24
PC5: U1.25
PC6: U1.37 U7.5 | length 1026.8
  Top Layer w10: U7.5 3237.35,2973.35 v7(3243,2979) ; v7(4052,2954) 4115.41,2954 U1.37
  Bottom Layer w10: v7(3243,2979) 3280,3016 4027,3016 4052,2991 v7(4052,2954)
PC7: R13.1 R14.2 U1.38 | length 1378.1
  Top Layer w10: v1(3275,2777) 3286,2766 3489,2766 v1(3503,2752) ; v1(4058,2907) 4058,2908.91 4081.52,2932.43 4113.73,2932.43 U1.38
  Bottom Layer w10: R14.2 2982,2895 3100,2777 v1(3275,2777) ; v1(3503,2752) 3959,2752 4058,2851 v1(4058,2907)
PC8: U1.39
PC9: U1.40
PC10: U1.51
PC11: U1.52
PC12: U1.53
PC13: U1.2
PC14: U1.3
PC15: U1.4
PD2: U1.54
RXD: P3.3 U6.13 | length 427.4
  Top Layer w10: U6.13 3778.53,2868.23 3750,2839.7 3750,2670 P3.3@3885,2535
TCK: P5.1 U1.49 | length 1423.8
  Top Layer w10: U1.49 4189.14,2667.29 4189.14,2699.5 v4(4208,2718.36)
  Bottom Layer w10: v9(3153,3109) 3222,3040 4104.59,3040 4137,3007.59 4137,2759 4177.64,2718.36 v4(4208,2718.36)
TMS: P5.2 U1.46 | length 1360.8
  Top Layer w10: U1.46 4151.73,2776.73 4180,2805 v7(4195,2805)
  Bottom Layer w10: v6(3188,3149) 3267,3070 4135,3070 4170,3035 4170,2900 4195,2875 v7(4195,2805)
TXD: P3.4 U6.14 | length 647.6
  Top Layer w10: v4(3725,2600) 3710,2615 3710,2855 3750,2895 U6.14@3805,2895
  Bottom Layer w10: v4(3725,2600) 3898,2600 P3.4
pads on no net: U2.6 U2.7 U4.6 U4.7 U6.7 U6.8 U6.9 U6.10 U7.6 U7.7
copper on no net:
  other v5: 2821.7,2399.45 3412.25,2399.45 4199.65,2399.45 4790.2,2399.45 2692.39,2903.92 4919.5,2903.92 3527.56,3739.09 4084.34,3739.09

## Keep-outs
Keep-Out Layer:
  lines w5: 2581.04,2903.92 2708.36,2776.6 cw(c2624.84,2693.08) 2742.96,2693.08 2742.96,2340.39 3805.95,2340.39 4868.94,2340.39 4868.94,2693.08 cw(c4987.05,2693.08) 4903.53,2776.6 5030.86,2903.92 4084.34,3850.44 3947.46,3713.57 cw(c3863.94,3797.08) 3863.94,3678.97 3747.95,3678.97 cw(c3747.95,3797.08) 3664.44,3713.57 3527.56,3850.44 2581.04,2903.92

## Other copper
Top Layer:
  rectangle net +5V: 3280,2485 3405.23,2525
Bottom Layer:
  rectangle net Net_1: 3179,2848 3215,2921
  region net Net_1: 3177,2802 3232.86,2857.86 3207.41,2883.32 3151.54,2827.46
  region net +5V: 3989.04,3494.04 4035,3540 4013.79,3561.21 3967.82,3515.25
  region net +5V: 3379.25,3245.25 3329.75,3294.75 3305,3270 3354.5,3220.5
  region net NetQ1_1: 4190.5,3300.5 4240,3350 4215.25,3374.75 4165.75,3325.25
  rectangle net +5V: 3280,2485 3375,2525

## Silkscreen, mask and mechanical layers (free items; w line width, h text height)
Bottom Overlay:
  drawing of 279 lines, arcs and shapes, not listed